# Altium PCB FV1_Final_V1.1.pcbdoc
Units mil, origin at the board's own origin, x right, y up, seen from the top; angles counter-clockwise.
Board outline 7337.36 x 6064.41 mil, 2 copper layers (Top Layer, Bottom Layer); 92 components, 87 nets, 298 pads, 78 vias.
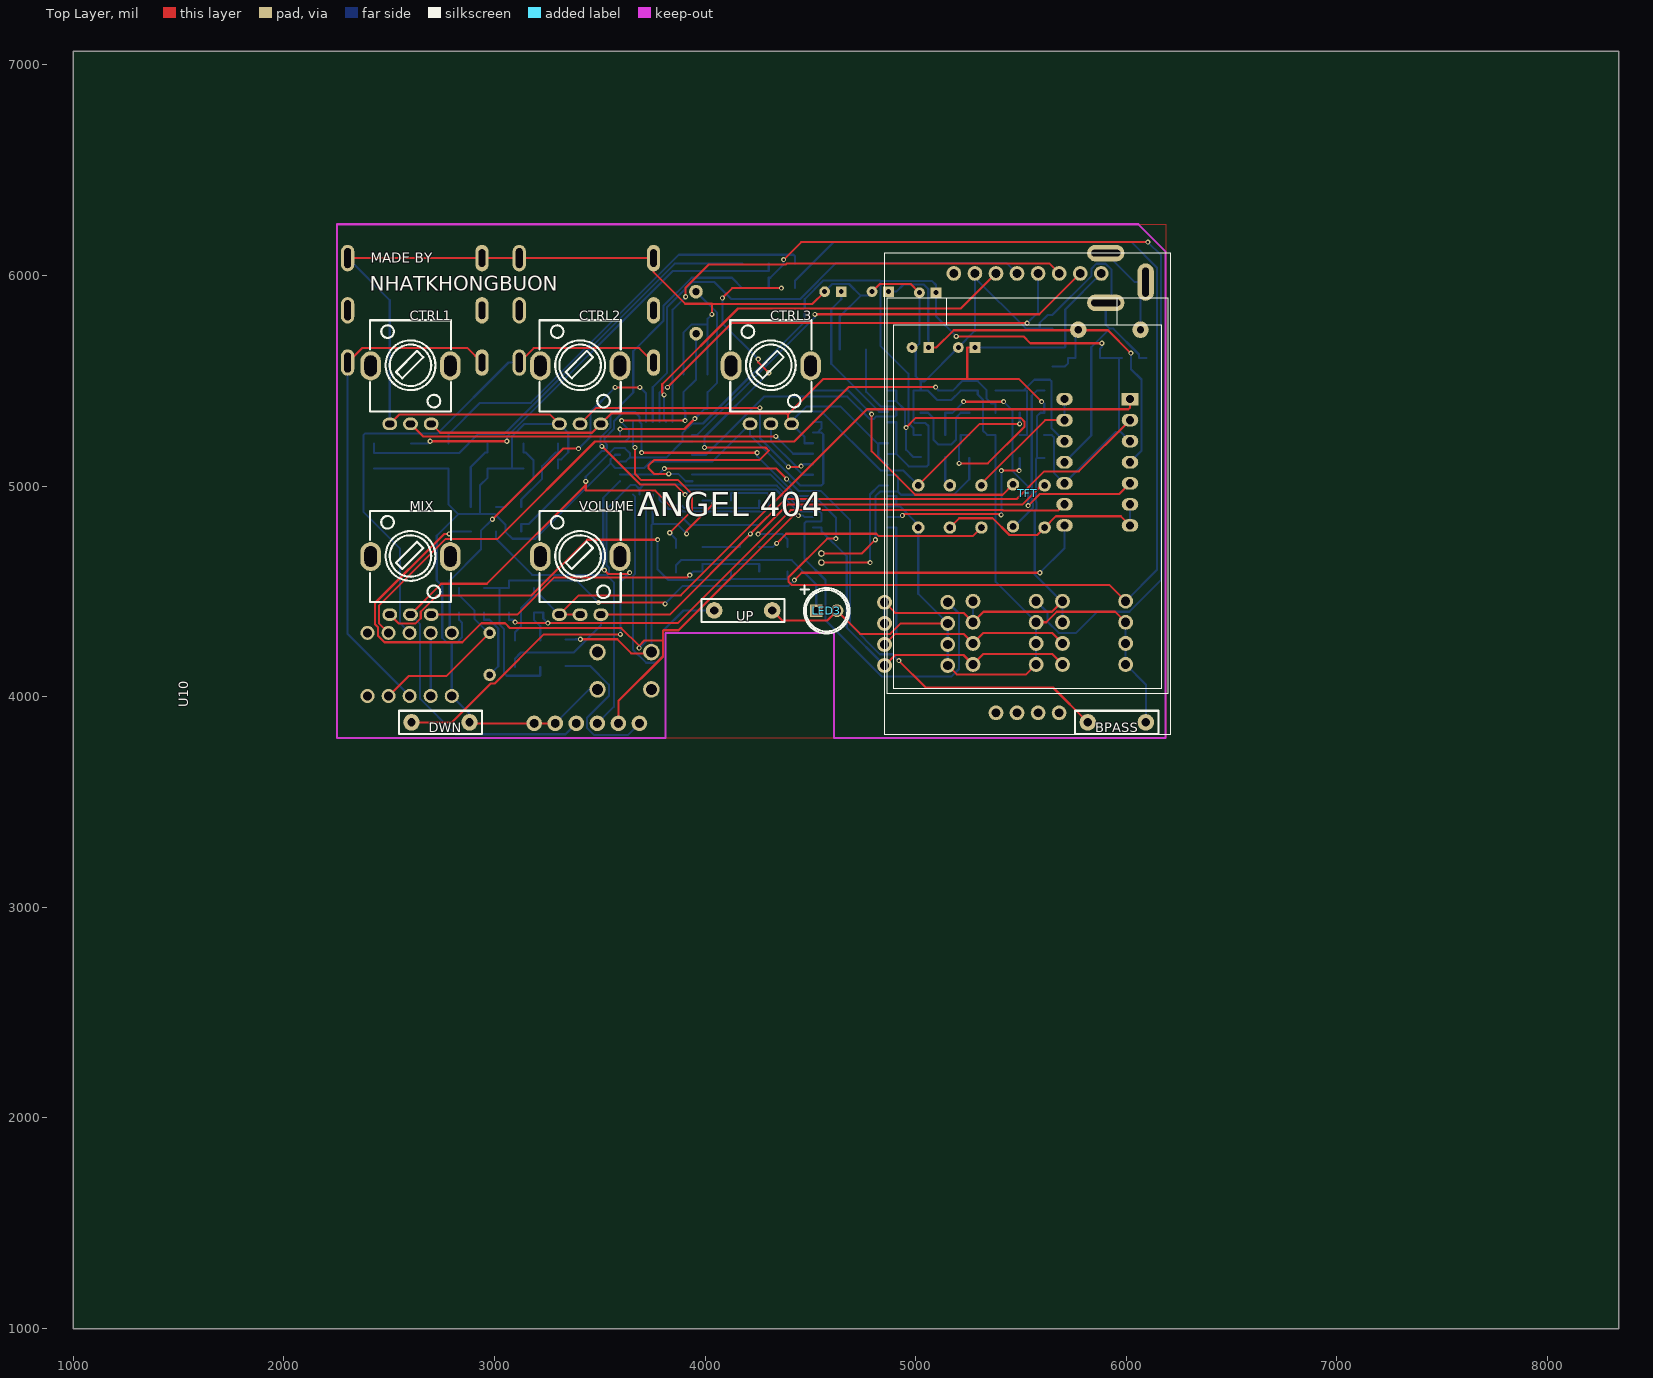
[diagram p0: Top Layer view]
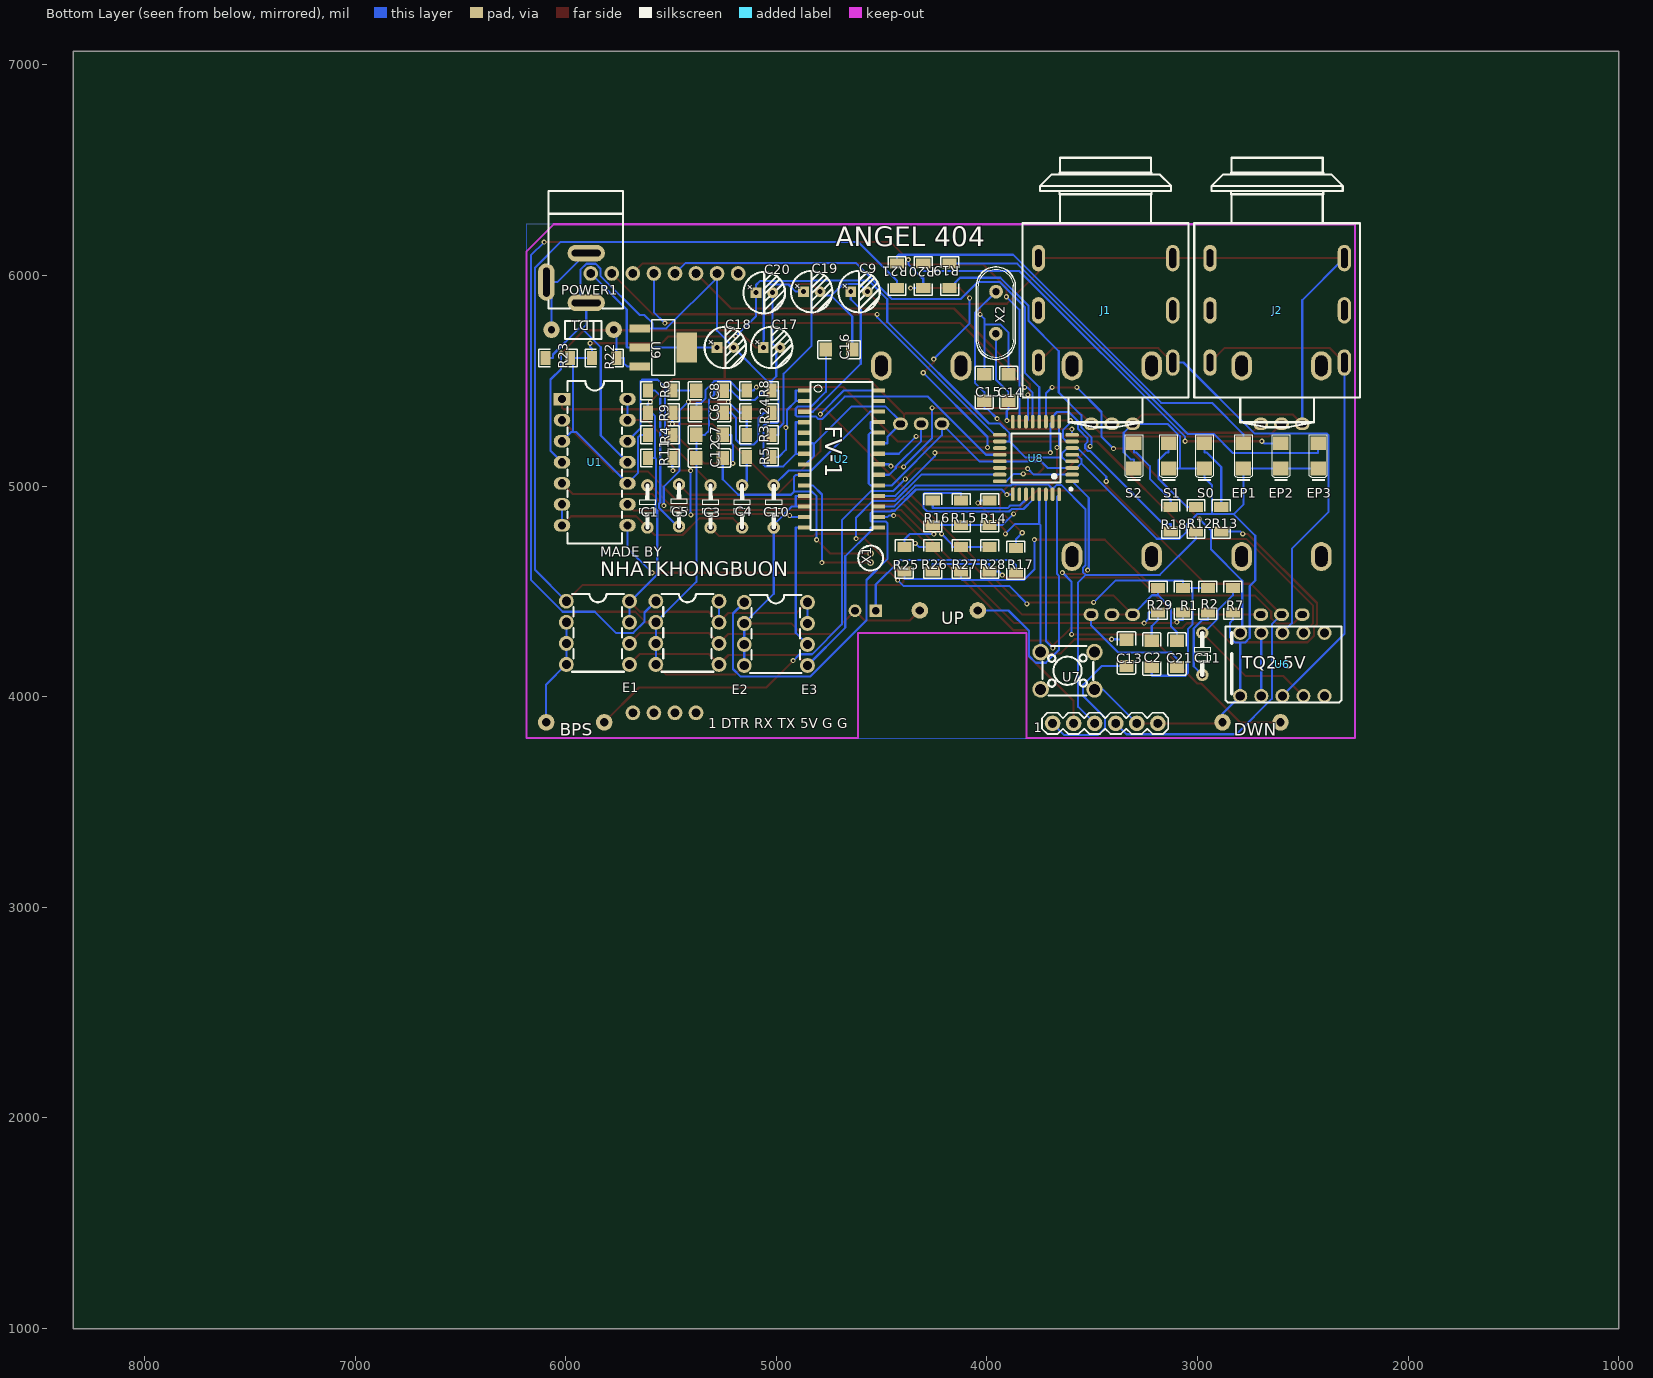
[diagram p1: Bottom Layer view, seen from below]

## Layer stack, top to bottom
Top Layer: signal copper (thickness not stored)
Dielectric: dielectric 12.6, FR-4, Dk 4.8
Bottom Layer: signal copper (thickness not stored)

## Board outline
8337.36,1000 1000,1000 1000,7064.41 8337.36,7064.41

## Components (designator, comment, footprint, x,y, rotation, side; value= is the part's Value field where it differs from the comment)
1 "M06SIP" 1X06 3451.73,3873.5 r0 bottom
BPASS "Momentary Footswitch" "MOMENTARY FOOTSWITCH" 5816.73,3878.5 r0 top
C1 "1u" "MLCC 5MM" 5611.73,4903.5 r270 bottom
C2 "470p" C1206 3216.73,4203.5 r90 bottom
C3 "1u" "MLCC 5MM" 5311.73,4903.5 r90 bottom
C4 "1u" "MLCC 5MM" 5161.73,4903.5 r270 bottom
C5 "1u" "MLCC 5MM" 5461.73,4908.5 r90 bottom
C6 "100n" C1206 5316.73,5348.5 r0 bottom
C7 "1n" C1206 5316.73,5243.5 r0 bottom
C8 "2n2" C1206 5316.73,5453.5 r180 bottom
C9 "10u" CAP_GT_5X11 4606.73,5923.5 r0 bottom
C10 "1u" "MLCC 5MM" 5011.73,4903.5 r90 bottom
C11 "1u" "MLCC 5MM" 2976.73,4203.5 r270 bottom
C12 "15p" C1206 5316.73,5133.5 r180 bottom
C13 "0.1u" C1206 3336.73,4208.5 r90 bottom
C14 "22p" C1206 3896.73,5468.5 r90 bottom
C15 "22p" C1206 4011.73,5468.5 r90 bottom
C16 "0.1u" C1206 4701.73,5648.5 r0 bottom
C17 "10U" CAP_GT_5X11 5021.73,5658.5 r0 bottom
C18 "47U" CAP_GT_5X11 5241.73,5658.5 r0 bottom
C19 "100U" CAP_GT_5X11 4831.73,5923.5 r0 bottom
C20 "47U" CAP_GT_5X11 5056.73,5918.5 r0 bottom
C21 "220p" C1206 3096.73,4203.5 r270 bottom
CTRL1 "B100K" RES-ADJ-TH_RV09 2600.71,5433.41 r0 top
CTRL2 "B100K" RES-ADJ-TH_RV09 3406.22,5433.41 r0 top
CTRL3 "B100K" RES-ADJ-TH_RV09 4311.73,5433.41 r0 top
D1 "1N5159" DIODE 5771.73,5743.5 r180 bottom
DWN "Momentary Footswitch" "MOMENTARY FOOTSWITCH" 2605.43,3878.3 r0 top
E1 "24LC32AF-E/P" PDIP-8_L9.3-W6.4-P2.54-LS7.6-BL 5846.73,4303.5 r90 bottom
E2 "24LC32AF-E/P" PDIP-8_L9.3-W6.4-P2.54-LS7.6-BL 5421.73,4303.5 r90 bottom
E3 "24LC32AF-E/P" PDIP-8_L9.3-W6.4-P2.54-LS7.6-BL 5001.73,4298.5 r90 bottom
EP1 "LED" LED1206-FD_GREEN 2781.73,5143.5 r90 bottom
EP2 "LED" LED1206-FD_GREEN 2604.23,5143.5 r90 bottom
EP3 "LED" LED1206-FD_GREEN 2426.73,5143.5 r90 bottom
J1 "JACK 6.5mm" AUDIO-TH_PJ-609BA 3436.14,5834.99 r90 bottom
J2 "JACK 6.5mm" AUDIO-TH_PJ-609BA 2621.18,5834.99 r90 bottom
LED3 "LED-1206_G" LED-DIP-Φ5*2.5MM 4576.73,4408.5 r0 top
MIX "B100K" RES-ADJ-TH_RV09 2600.71,4527.9 r0 top
POWER1 "DC-005 5.5-2.0MM" DC-IN-TH_DC-5520-1 5996.73,5988.5 r90 bottom
R1 "15K" R1206 3068.39,4458.5 r90 bottom
R2 "100R" R1206 2950.06,4458.5 r270 bottom
R3 "1M" R1206 5081.73,5243.5 r0 bottom
R4 "100K" R1206 5551.73,5243.5 r180 bottom
R5 "1K" R1206 5081.73,5138.5 r180 bottom
R6 "1K" R1206 5551.73,5453.5 r0 bottom
R7 "100K" R1206 2831.73,4458.5 r90 bottom
R8 "1M" R1206 5081.73,5453.5 r180 bottom
R9 "100R" R1206 5551.73,5348.5 r180 bottom
R11 "10K" R1206 5551.73,5133.5 r0 bottom
R12 "330R" R1206 3006.73,4843.5 r270 bottom
R13 "330R" R1206 2886.73,4843.5 r270 bottom
R14 "10K" R1206 3986.73,4873.5 r90 bottom
R15 "1k" R1206 4121.73,4873.5 r90 bottom
R16 "1k" R1206 4256.73,4873.5 r90 bottom
R17 "330R" R1206 3861.73,4648.5 r270 bottom
R18 "330R" R1206 3126.73,4843.5 r90 bottom
R19 "330R" R1206 4176.73,5998.5 r90 bottom
R20 "330R" R1206 4301.73,5998.5 r90 bottom
R21 "330R" R1206 4426.73,5998.5 r90 bottom
R22 "10K" R1206 5816.73,5608.5 r0 bottom
R23 "12K" R1206 6036.73,5608.5 r180 bottom
R24 "1K" R1206 5081.73,5348.5 r0 bottom
R25 "15K" R1206 4391.73,4653.5 r270 bottom
R26 "15K" R1206 4256.73,4653.5 r270 bottom
R27 "15K" R1206 4121.73,4653.5 r90 bottom
R28 "15K" R1206 3986.73,4653.5 r90 bottom
R29 "15K" R1206 3186.73,4458.5 r270 bottom
S0 "LED-1206_G" LED1206-FD_GREEN 2966.73,5143.5 r90 bottom
S1 "LED-1206_G" LED1206-FD_GREEN 3136.73,5143.5 r90 bottom
S2 "LED-1206_G" LED1206-FD_GREEN 3301.73,5143.5 r90 bottom
TFT "1.8\"_TFT" "1.8\"_TFT" 5451.73,4958.5 r270 top
U1 "TL074ING4" PDIP-14_L19.6-W6.5-P2.54-LS7.9-BL 5861.73,5113.5 r90 bottom
U2 "FV-1" FV-1 4866.73,4803.5 r0 bottom
U6 "ATQ209SA" ATQ209 2876.73,4343.5 r0 bottom
U7 "SW" KEY-TH_4P-L6.0-W6.0-P4.50-LS6.50 3616.73,4123.5 r0 bottom
U8 "ATMEGA328P-AUR" TQFP-32_L7.0-W7.0-P0.80-LS9.0-BL 3766.73,5133.5 r270 bottom
U9 "AMS1117-3.3V" SOT-223-4_L6.5-W3.5-P2.30-LS7.0-BR 5536.73,5658.5 r180 bottom
U10 "1590BB COPY" 1590BB-EMI 4171.73,4563.5 r90 top
UP "Momentary Footswitch" "MOMENTARY FOOTSWITCH" 4042.43,4409.79 r0 top
VOLUME "B100K" RES-ADJ-TH_RV09 3406.22,4527.9 r0 top
X1 "-" OSC-TH_BD3.0-P1.10-D0.4 4551.73,4658.5 r270 bottom
X2 "Crystal 16Mhz" GM-CRYSTAL-16MHZ 3956.73,5823.5 r270 bottom
? "" ? 4216.73,3603.65 r0 top
? "" ? 2997.52,2177.22 r0 top
? "" ? 7107.17,5488.74 r0 top
? "" ? 7719.52,4563.56 r0 top
? "" ? 4173.7,1602.43 r0 top
? "" ? 3059.53,2437.07 r0 top
? "" ? 4171.73,1901.65 r0 top
? "" ? 7445.14,4561.6 r0 top
? "" ? 6772.91,5424.09 r0 top
? "" ? 1663.18,2777.06 r0 top

## Footprints (in the part's own frame and the unit in brackets; to place one, negate y for a bottom-side part, rotate by r counter-clockwise, add the part's x,y. Pads: shape width x height; smd on the part's side, far side on the other; paste and mask are expansions set on the pad)
"1.8\"_TFT" [mil]
  round 70 hole 39.36 paste+0 mask+2: P$3(1035.04,228.74) P$4(1035.04,129.13) P$5(1035.04,29.13) P$6(1035.04,-70.87) P$9(-1051.57,429.13) P$10(-1051.57,329.13) P$11(-1051.57,229.13) P$12(-1051.57,129.13) P$13(-1051.57,29.13) P$14(-1051.57,-70.87) P$15(-1051.57,-170.87) P$16(-1051.57,-270.87)
  silkscreen extent -1150,-600 1139,757
1X06 [mil]
  round 74 hole 40 slot 40.2 at 90 deg paste+0 mask+2: 1(236.22,0) 2(136.22,0) 3(36.22,0) 4(-63.78,0) 5(-163.78,0) 6(-263.78,0)
  silkscreen extent -314,-50 286,50
1590BB-EMI [mil]
ATQ209 [mil]
  round 66.93 hole 43.31 paste+0 mask+2: 1(-80,40) 2(-180,40) 3(-280,40) 4(-380,40) 5(-480,40) 6(-480,340) 7(-380,340) 8(-280,340) 9(-180,340) 10(-80,340)
  silkscreen extent -560,10 -10,370
AUDIO-TH_PJ-609BA [mm]
  oval 3.2x1.6 hole 0.8 slot 2.1 at 0 deg paste+0 mask+0.051: 2(6.3,8.1) 4(0,8.1) 6(-6.3,8.1)
  oval 3.2x1.6 hole 0.8 slot 2.4 at 0 deg paste+0 mask+0.051: 3(6.3,-8.1) 5(0,-8.1) 7(-6.3,-8.1)
  silkscreen extent -14.1,-10 18.4,10
C1206 [mm]
  rect 1.485x1.728 smd paste-100 mask+0.051: 1(1.593,0) 2(-1.593,0)
  silkscreen extent -2.56,-1.09 2.56,1.09
CAP_GT_5X11 [mm]
  rect 1.3x1.3 hole 0.6 paste+0 mask+0.051: 1(1.001,0)
  round 1.3 hole 0.6 paste+0 mask+0.051: 2(-1.001,0)
  silkscreen extent -2.5,-2.5 2.5,2.5
DC-IN-TH_DC-5520-1 [mm]
  oval 4.5x2 hole 0.8 slot 3.5 at 0 deg paste+0 mask+0.051: 2(-0.5,2.4)
  oval 2x4.5 hole 0.8 slot 3.5 at 90 deg paste+0 mask+0.051: 3(3,-2.4) 4(-3,-2.4)
  silkscreen extent -3.7,-6.85 10.5,2.16
DIODE [mm]
  round 2 hole 0.9 paste+0 mask+0.051: 1(0,-0.016) 2(-7.5,-0.016)
  silkscreen extent -5.87,-1.14 -1.47,1.06
FV-1 [mm]
  rect 1.5x0.5 smd paste+0 mask+0.051: 1(0.001,-16.51) 2(0.001,-15.241) 3(0.001,-13.97) 4(0.001,-12.701) 5(0,-11.43) 6(0.001,-10.16) 7(0.001,-8.891) 8(0,-7.62) 9(0.001,-6.35) 10(0,-5.08) 11(0,-3.81) 12(0.001,-2.54) 13(0,-1.27) 14(0,0) 15(-9.01,0) 16(-9.009,-1.28) 17(-9.009,-2.55) 18(-9.009,-3.82) 19(-9.009,-5.09) 20(-9.009,-6.36) 21(-9.01,-7.63) 22(-9.009,-8.901) 23(-9.009,-10.17) 24(-9.009,-11.44) 25(-9.009,-12.711) 26(-9.009,-13.98) 27(-9.009,-15.251) 28(-9.009,-16.52)
  silkscreen extent -8.22,-17.57 -0.76,0.29
GM-CRYSTAL-16MHZ [mil]
  round 65 hole 32 slot 32.2 at 0 deg paste+0 mask+2: 1(99.51,-0.5) 2(-100,0.5)
  silkscreen extent -217,-93 223,92
KEY-TH_4P-L6.0-W6.0-P4.50-LS6.50 [mm]
  round 2 hole 1.3 paste+0 mask+0.051: 1(3.25,-2.25) 2(-3.25,-2.25) 3(3.25,2.25) 4(-3.25,2.25)
  silkscreen extent -3.1,-3 3,3
LED1206-FD_GREEN [mm]
  rect 1.635x1.87 smd paste-100 mask+0.051: 1(1.517,0) 2(-1.518,0)
  silkscreen extent -2.98,-1.06 2.58,1.05
LED-DIP-Φ5*2.5MM [mil]
  rect 60x60 hole 36 paste+0 mask+2: 1(-49.21,0)
  round 60 hole 36 paste+0 mask+2: 2(49.21,0)
  silkscreen extent -125,-108 108,120
"MLCC 5MM" [mil]
  round 59.05 hole 29.52 slot 29.53 at 0 deg paste+0 mask+2: 1(100,0) 2(-100,0)
  silkscreen extent -100,-39 100,39
"MOMENTARY FOOTSWITCH" [mm]
  round 2 hole 1 paste+0 mask+0.051: 1(0,0) 2(7,0)
  silkscreen extent -1.52,-1.4 8.51,1.4
OSC-TH_BD3.0-P1.10-D0.4 [mm]
  round 0.8 hole 0.5 paste+0 mask+0.051: 1(0.55,0) 2(-0.55,0)
  silkscreen extent -1.5,-1.5 1.5,1.5
PDIP-8_L9.3-W6.4-P2.54-LS7.6-BL [mm]
  round 1.8 hole 1.1 paste+0 mask+0.051: 1(3.81,3.81) 2(1.27,3.81) 3(-1.27,3.81) 4(-3.81,3.81) 5(-3.81,-3.81) 6(-1.27,-3.81) 7(1.27,-3.81) 8(3.81,-3.81)
  silkscreen extent -4.7,-3.11 4.7,3.11
PDIP-14_L19.6-W6.5-P2.54-LS7.9-BL [mm]
  rect 1.5x2 hole 1 paste+0 mask+0.051: 1(7.62,3.95)
  oval 1.5x2 hole 1 paste+0 mask+0.051: 2(5.08,3.95) 3(2.54,3.95) 4(0,3.95) 5(-2.54,3.95) 6(-5.08,3.95) 7(-7.62,3.95) 8(-7.62,-3.95) 9(-5.08,-3.95) 10(-2.54,-3.95) 11(0,-3.95) 12(2.54,-3.95) 13(5.08,-3.95) 14(7.62,-3.95)
  silkscreen extent -9.8,-3.3 9.8,3.3
R1206 [mil]
  rect 47.54x66.97 smd paste-3937.01 mask+2: 1(58.22,0) 2(-58.22,0)
  silkscreen extent -91,-42 91,42
RES-ADJ-TH_RV09 [mm]
  oval 1.8x1.5 hole 0.8 slot 1.1 at 0 deg paste+0 mask+0.05: 1(-2.5,-3.5) 2(0,-3.5) 3(2.5,-3.5)
  oval 2.5x3.5 hole 1.5 slot 2.5 at 90 deg paste+0 mask+0.05: 4(4.8,3.5) 5(-4.8,3.5)
  silkscreen extent -4.9,-2 4.9,9
SOT-223-4_L6.5-W3.5-P2.30-LS7.0-BR [mm]
  rect 2.47x0.98 smd paste+0 mask+0.051: 1(-2.835,2.3) 2(-2.835,0) 3(-2.835,-2.3)
  rect 2.47x3.6 smd paste+0 mask+0.051: 4(2.835,0)
  silkscreen extent -1.37,-3.33 1.37,3.33
TQFP-32_L7.0-W7.0-P0.80-LS9.0-BL [mm]
  oval 0.45x1.65 smd paste+0 mask+0.051: 1(2.8,4.369) 2(2,4.369) 3(1.2,4.369) 4(0.4,4.369) 5(-0.4,4.369) 6(-1.2,4.369) 7(-2,4.369) 8(-2.8,4.369) 17(-2.8,-4.369) 18(-2,-4.369) 19(-1.2,-4.369) 20(-0.4,-4.369) 21(0.4,-4.369) 22(1.2,-4.369) 23(2,-4.369) 24(2.8,-4.369)
  oval 1.65x0.45 smd paste+0 mask+0.051: 9(-4.381,2.8) 10(-4.381,2) 11(-4.381,1.2) 12(-4.381,0.4) 13(-4.381,-0.4) 14(-4.381,-1.2) 15(-4.382,-2) 16(-4.382,-2.8) 25(4.381,-2.8) 26(4.381,-2) 27(4.381,-1.2) 28(4.381,-0.4) 29(4.381,0.4) 30(4.381,1.2) 31(4.382,2) 32(4.382,2.8)
  silkscreen extent -2.94,-2.95 3.91,4.36
? [mil]

## Via types
v1: diameter 24.02, hole 12.01, Top Layer to Bottom Layer, tented both sides, 70 vias
v2: diameter 24.41, hole 12.2, Top Layer to Bottom Layer, tented both sides, 8 vias

## Nets (pads, with @x,y where several pads share a name; then routed paths per layer and width w, separated by ;. In a path a pad name is that pad's centre, name@x,y a point inside that pad or via, vN(x,y) a via of type N, cw(c..) or ccw(c..) an arc to the next point about the centre after c; other vN are vias at no path point)
9V: D1.2 POWER1.2 POWER1.3 | length 472
  Bottom Layer w10: POWER1.3 6040.03,5968.82 POWER1.2@6067.01,5968.82 ; D1.2 POWER1.2@6067.01,5968.82 ; POWER1.2 POWER1.2@6067.01,5968.82
+3.3V: C18.1 CTRL1.3 CTRL2.3 CTRL3.3 E1.7 E1.8 E2.7 E2.8 E3.7 E3.8 R9.2 R11.1 TFT.P$9 U2.6 U2.8 U2.23 U9.2 U9.4 | length 7313.5
  Top Layer w10: CTRL1.3 2741.38,5253.37 3462.41,5253.37 CTRL2.3 3555.44,5346.4 4386.84,5346.4 4392.87,5340.37 ; CTRL3.3 4392.87,5312.9 4392.87,5340.37 ; E3.8 4901.73,4398.5 5226.73,4398.5 E2.7 5321.73,4403.5 5646.73,4403.5 E1.8 ; C18.1 5244.55,5658.5 5244.55,5509.49 ; v1(5597.77,5401) 5489.28,5509.49 5244.55,5509.49 ; 4392.87,5340.37 4561.99,5509.49 5244.55,5509.49
  Bottom Layer w10: U2.23 4471.49,5203.9 4471.49,5234.28 CTRL3.3 4410.16,5307.38 4481.67,5378.89 4641.88,5378.89 4821.74,5199.03 ; E3.7 E3.8 ; U2.8 4860.77,5103.51 4821.74,5142.54 4821.74,5199.03 ; U2.6@4866.73,5203.51 4826.22,5203.51 4821.74,5199.03 ; E2.7 E2.8 ; C18.1 U9.4 5588.73,5658.5 5622.51,5658.5 U9.2 5707.96,5658.5 5709.82,5660.36 5709.82,5839.03 TFT.P$9 ; v1(5597.77,5401) 5605.8,5392.97 5609.95,5392.97 5609.95,5348.5 5592.57,5348.5 5575.12,5331.05 5575.12,5133.57 5575.19,5133.5 ; R11.1@5609.95,5133.5 5575.19,5133.5 ; E1.7 E1.8 5692.1,4453.5 5564.97,4580.63 5564.97,4883.51 5572.98,4891.52 5572.98,4923.94 5569.95,4926.97 5569.95,5128.26 5575.19,5133.5
+5V: 1.4 C20.1 MIX.2 R3.2 R4.2 R14.2 R15.2 R16.2 R22.1 R23.1 U1.3 U1.10 U8.4 U8.6 U8.18 | length 8659.5
  Top Layer w10: MIX.2 2746.98,4536.37 2963.67,4536.37 3432.9,5005.6 v1(3432.9,5022.71) ; 3432.93,5005.6 3432.93,4978.5 3763.03,4978.5 v1(3872.79,4868.69) ; v1(5192.28,5710.97) 5511.75,5710.97 5544.06,5678.66 v1(5884.08,5678.66)
  Bottom Layer w10: MIX.2 2646.73,4344.08 2646.73,3989.68 2814.36,3822.05 3336.5,3822.05 1.4 ; v1(3432.9,5022.71) 3432.9,5044.9 3568.74,5180.74 U8.6 3618.21,5180.74 3643.74,5155.21 3643.74,5138.3 ; U8.4 3623.19,5117.75 3643.74,5138.3 ; v1(3872.79,4868.69) 3926.2,4815.28 R14.2 R15.2 R16.2 ; U8.18 3891.86,5212.24 ; R3.2 4988.75,5243.5 4988.75,5276.28 4964.94,5300.09 4964.94,5533.83 4831.73,5667.04 4831.73,5973.28 ; v1(5192.28,5710.97) 5096.13,5807.12 C20.1 5096.13,5955.08 5077.93,5973.28 4831.73,5973.28 ; R4.2@5609.95,5243.5 5644.71,5243.5 5655.74,5232.47 5655.74,5063.98 U1.10 5949.69,5256.97 5965.56,5256.97 ; v1(5884.08,5678.66) 5884.08,5662.1 5874.95,5652.97 5874.95,5608.5 R23.1@5965.56,5608.5 ; R23.1 R23.1@5965.56,5608.5 ; U1.3 5973.77,5256.97 5965.56,5256.97 ; 3643.74,5138.3 3646.43,5135.61 3815.23,5135.61 3891.86,5212.24 ; 3891.86,5212.24 3891.86,5250.76 3938.28,5297.18 3989.71,5297.18 4472.7,5780.17 4472.7,5887.72 4561.41,5976.43 4828.58,5976.43 4831.73,5973.28 ; 5965.56,5256.97 R23.1@5965.56,5608.5
A3: U8.26
A4: R16.1 U8.27 | length 519.6
  Bottom Layer w10: U8.27 3813.97,4936.66 3842.83,4907.8 3889,4907.8 3901.35,4895.45 4255.22,4895.45 4256.73,4896.96 R16.1
A5: R15.1 U8.28 | length 855.1
  Bottom Layer w10: U8.28 3782.48,4935.11 3825.84,4891.75 3882.35,4891.75 3894.7,4879.4 4283.55,4879.4 4301.27,4897.12 4301.27,4960.06 4294.78,4966.55 4121.8,4966.55 4121.73,4966.48 R15.1
A6: U8.19
A7: U8.22
BYPASS_BTN: BPASS.1 U8.2 | length 3023
  Top Layer w10: v1(3806.73,5083.5) 4337.46,5083.5 v1@4387.05,5033.91 ; v1(4919.86,4171.42) 5047.5,4043.78 5651.45,4043.78 BPASS.1
  Bottom Layer w10: U8.2 3777.99,5054.76 v1(3806.73,5083.5) ; v1(4387.05,5033.91) 4443.34,4977.62 4548.88,4977.62 4688.07,4838.43 4688.07,4343.42 4829.48,4202.01 4889.27,4202.01 v1(4919.86,4171.42)
C1_2: C1.2 R25.2 | length 1642.1
  Top Layer w10: v1(4251.3,4772.49) 4390.9,4912.09 5505.62,4912.09 5597.03,5003.5 C1.2
  Bottom Layer w10: v1(4251.3,4772.49) 4365.73,4772.48 4391.73,4746.48 R25.2
C3_2: C3.2 R26.2 | length 1102.1
  Top Layer w10: v1(4339.06,4727.8) 4385.16,4773.9 4812.67,4773.9 4823.68,4762.89 5271.12,4762.89 C3.2
  Bottom Layer w10: R26.2 4301.2,4711.72 4322.98,4711.72 v1(4339.06,4727.8)
C4_2: C4.2 R5.2 | length 144
  Bottom Layer w10: R5.2@5139.95,5138.5 5139.95,5025.28 C4.2
C5_2: C5.2 R6.1 | length 735.1
  Bottom Layer w10: C5.2 5467.26,4808.5 5556.93,4898.17 5556.93,4917.29 5550.77,4923.45 5550.77,5429.08 5575.19,5453.5 R6.1@5609.95,5453.5
C6_2: C6.2 R24.2 | length 476.8
  Bottom Layer w10: R24.2 5058.27,5348.5 5083.97,5322.8 5083.97,5220.25 5106.31,5197.91 5168.18,5197.91 5190.83,5220.56 5190.83,5325.52 5213.81,5348.5 C6.2
DOWN_BTN: DWN.1 U8.1 | length 2063.9
  Top Layer w10: DWN.1 2797.97,3878.3 2982.58,4062.91 2999.94,4062.91 3233.12,4296.09 v1(3597.82,4296.09) ; v1(3521.14,4601.55) 3539.96,4582.73 3633.77,4582.73 v1(3640.79,4589.75)
  Bottom Layer w10: v1(3521.14,4601.55) 3515.75,4606.94 3515.75,4944.28 U8.1 ; v1(3597.82,4296.09) 3597.83,4546.79 v1(3640.79,4589.75)
DTR: 1.1 C13.2 | length 778.2
  Bottom Layer w10: C13.2 3381.74,4145.8 3453.9,4145.8 3542.58,4057.12 3542.58,4003.85 3437.95,3899.22 3437.95,3852.54 3472.99,3817.5 3631.95,3817.5 1.1
E1: E1.1 R21.2 U8.23 | length 6354.2
  Top Layer w10: v1(4620.78,4750.84) 4579.78,4750.84 4395.23,4566.29 4395.23,4546.98 4412.22,4529.99 5920.24,4529.99 E1.1
  Bottom Layer w10: U8.23 4310.89,5054.76 4435.71,4929.94 4542.09,4929.94 4620.78,4851.25 v1(4620.78,4750.84) ; R21.2 4426.73,5975.04 4611.44,6159.75 6023.53,6159.75 6144.86,6038.42 6144.86,4601.63 E1.1
E2: E2.1 R20.2 U8.24 | length 6792.3
  Top Layer w10: v2(3826.73,5058.5) 3756.73,5058.5 3731.73,5083.5 3731.73,5098.5 3756.73,5123.5 4256.73,5123.5 4301.73,5168.5 4286.73,5183.5 v2(3996.73,5183.5) ; v2(4081.73,5893.5) 4128.51,5940.28 v2(4361.73,5940.28) ; v2(4251.73,5603.5) 4251.73,5588.5 v2(4301.73,5538.5) ; v1(4372.27,6075.73) 4455.39,6158.85 v1(6102.29,6158.85)
  Bottom Layer w10: v2(3826.73,5058.5) 3871.73,5058.5 3906.97,5023.26 U8.24 ; v2(3996.73,5183.5) 3996.73,5233.5 v2(4301.73,5538.5) ; v2(4081.73,5893.5) 4081.73,5773.5 v2(4251.73,5603.5) ; v2(4361.73,5940.28) R20.2 4301.73,5975.04 4301.73,5989.58 4308.96,5989.58 4372.27,6052.89 v1(4372.27,6075.73) ; E2.1 5625.24,4399.99 5625.24,4356.43 5678.17,4303.5 5761.22,4303.5 5861.22,4403.5 6013.63,4403.5 6165,4554.87 6165,6096.14 v1(6102.29,6158.85)
E3: E3.1 R19.2 U8.25 | length 4188.2
  Top Layer w10: v1(3509.81,5189.08) 3690.43,5008.5 3855.93,5008.5 v1(3904.72,4959.71)
  Bottom Layer w10: v1(3509.81,5189.08) 3502.48,5196.41 3502.48,5230.16 3551.13,5278.81 3551.13,5337.24 3658.48,5444.59 3658.48,5641.35 3801.9,5784.77 3801.9,5855.93 3935.53,5989.56 4127.45,5989.56 R19.2 ; U8.25 3903.43,4961 v1(3904.72,4959.71) 3928.84,4983.83 4336.42,4983.83 4436.99,4883.26 4451.98,4883.26 4456.35,4878.89 4544.6,4878.89 4552.6,4870.89 4552.6,4835.9 4549.69,4832.99 4481.41,4832.99 4470.79,4822.37 4470.79,4654.86 4571.07,4554.58 4571.07,4363.42 4837.52,4096.97 5170.54,4096.97 5205.24,4131.67 5205.24,4394.99 E3.1
GND: 1.5 1.6 BPASS.2 C7.1 C8.1 C9.2 C10.2 C12.2 C14.1 C15.1 C16.2 C17.2 C18.2 C19.2 C20.2 CTRL1.1 CTRL2.1 CTRL3.1 DWN.2 E1.2 E1.3 E1.4 E2.2 E2.3 E2.4 E3.2 E3.3 E3.4 EP1.2 EP2.2 EP3.2 J1.2 J1.3 J2.2 J2.3 LED3.2 POWER1.4 R7.2 R8.1 R23.2 S0.2 S1.2 S2.2 TFT.P$15 U1.11 U2.4 U2.7 U2.11 U2.12 U2.19 U2.24 U2.25 U6.10 U7.4 U8.3 U8.5 U8.21 U9.1 UP.2 | length 21280.5
  Top Layer w10: J2.3 J2.2 J1.3 J1.2 3755.04,6016.23 3905.42,5865.85 4031.73,5865.85 v1(4031.73,5815.13) ; CTRL1.1 2546.07,5339.39 3264.02,5339.39 CTRL2.1 ; DWN.2 2885.82,3873.5 1.6 1.5 ; 4031.73,5865.8 4509.63,5865.8 C9.2 ; UP.2 4365.89,4361.93 4579.37,4361.93 LED3.2 4735.94,4298.5 4879.02,4298.5 4929.02,4348.5 E3.2 ; C19.2 4828.98,5960.15 4975.68,5960.15 C20.2 ; E3.4 5194.28,4105.95 5524.18,4105.95 E2.4 ; E2.2 5619.44,4353.5 5669.44,4403.5 5946.73,4403.5 E1.2
  Bottom Layer w10: J2.3 2502.29,5883.01 CTRL1.1 ; EP3.2 EP2.2 EP1.2 2781.73,4912.13 2826.97,4866.89 ; R7.2 2831.73,4382.9 2831.73,4365.52 2844.79,4352.46 2844.79,4281 2820.77,4256.98 2796.73,4256.98 ; DWN.2 2881.02,3919.21 U6.10 2796.73,4256.98 ; S1.2 3083.6,5083.76 ; 1.5 3449.37,4034.92 U7.4 ; S2.2 3301.73,5126.94 3316.39,5126.94 3349.6,5160.15 3349.6,5253.81 CTRL2.1 3141.96,5295.61 3083.6,5237.25 3083.6,5083.76 ; U8.5@3594.73,5149.25 3572.54,5149.25 3551.08,5127.79 3551.08,5108.05 ; C14.1 3896.73,5729.03 3935.83,5768.13 4011.73,5768.13 ; C15.1 4011.73,5768.13 ; v1(4031.73,5815.13) 4011.73,5795.13 4011.73,5768.13 ; U2.24 U2.24@4532.26,5253.89 ; U2.25 4532.27,5303.89 4552.53,5303.89 4552.53,5274.16 U2.24@4532.26,5253.89 ; C9.2 4603.98,5960.15 4682.8,5960.15 4738.12,5904.83 ; C16.2 4639.03,5805.74 4738.12,5904.83 ; C19.2 4773.66,5904.83 4738.12,5904.83 ; U2.11 4907.24,4953.49 4907.25,4903.5 ; U2.12@4866.73,4903.5 4907.25,4903.5 ; U2.7@4866.73,5153.51 4907.25,5153.51 ; U2.4@4866.73,5303.5 4907.25,5303.5 4907.32,5303.43 4907.32,5153.58 4907.25,5153.51 ; C17.2 C17.2@4999.83,5658.5 ; C20.2 5017.33,5676 C17.2@4999.83,5658.5 ; E3.4 E3.3 E3.2 5011.73,4488.5 C10.2 5011.73,4817.44 4925.67,4903.5 4907.25,4903.5 ; E2.4 E2.3 E2.2 5379.43,4545.8 5379.43,5088.49 C12.2 C7.1 5339.21,5243.5 5319.51,5263.2 5319.51,5409.83 5294.26,5435.08 5294.26,5453.5 5274.15,5453.5 C8.1 5213.81,5453.5 5213.32,5453.5 5168.78,5408.96 5102.81,5408.96 5058.27,5453.5 R8.1 ; U9.1 5588.73,5749.05 ; U1.11 5833.16,5240.44 5833.16,5660.35 5920.75,5747.94 ; E1.2 E1.3 E1.4 6092.32,4057.91 BPASS.2 ; R23.2@6094.95,5608.5 6060.19,5608.5 6060.19,5625.32 5937.57,5747.94 5920.75,5747.94 ; 2796.73,4256.98 2774.02,4256.98 2751.32,4279.68 2751.32,4526.12 2725.18,4552.26 2725.18,4765.1 2826.97,4866.89 ; 2826.97,4866.89 2928.36,4866.89 2931.27,4869.8 ; 2931.27,4869.8 2934.18,4866.89 3002.14,4866.89 3051.27,4817.76 3051.27,4784.1 3084.92,4750.45 3193.48,4750.45 3551.08,5108.05 ; 2931.27,4869.8 2931.27,5005.13 2966.73,5040.59 S0.2 3083.6,5083.76 ; 3551.08,5108.05 3572.87,5086.26 U8.3 3710.97,5086.26 3742.46,5117.75 U8.21 4035.45,5117.75 CTRL3.1 4213.31,5240.87 4450.3,5003.88 4471.49,5003.88 U2.19 4552.53,5003.88 4560.47,5011.82 4560.47,5245.94 4552.52,5253.89 U2.24@4532.26,5253.89 ; 4907.25,5153.51 4966.8,5093.96 5052.83,5093.96 5060.14,5101.27 5060.14,5285.48 5046.45,5299.17 4996.38,5299.17 4988.68,5306.87 4988.68,5453.43 4988.75,5453.5 R8.1 ; C17.2@4999.83,5658.5 4999.83,5521.65 5023.51,5497.97 ; R8.1 5023.51,5475.74 5023.51,5497.97 ; 5023.51,5497.97 5041.8,5497.97 C18.2 5280.86,5737.03 TFT.P$15 5280.86,5989.87 5521.68,5749.05 5588.73,5749.05 ; 5588.73,5749.05 5588.73,5775.17 5625.98,5812.42 5648.34,5812.42 5834.8,5998.88 5834.8,6033.19 5857.79,6056.18 5901.15,6056.18 5930.11,6027.22 5930.11,5898.26 POWER1.4 5902.24,5766.45 5920.75,5747.94
IC_4: C17.1 C19.1 D1.1 R22.2 U1.4 U9.3 | length 2373.5
  Top Layer w10: C17.1 5097.71,5658.5 5179.57,5740.36 D1.1@5771.73,5740.36 ; D1.1 D1.1@5771.73,5740.36 ; v1(6021.35,5631.54) 5912.53,5740.36 D1.1@5771.73,5740.36
  Bottom Layer w10: C19.1 4907.71,5923.5 4941.4,5957.19 5038.11,5957.19 5059.48,5935.82 5059.48,5696.73 5061.13,5695.08 C17.1 ; U9.3 5707.96,5567.95 5723.75,5583.74 5723.75,5608.5 R22.2 5758.51,5729.63 D1.1 ; U1.4 6071.6,5167.86 6071.6,5506.16 6021.35,5556.41 v1(6021.35,5631.54)
IN_FX: C6.1 R8.2 U6.4 | length 3648.6
  Top Layer w10: U6.4 2450.72,4349.51 2450.72,4432.75 2767.91,4749.94 3014.57,4749.94 3476.77,5212.14 4422.19,5212.14 4680.49,5470.44 v1(5094.44,5470.44)
  Bottom Layer w10: v1(5094.44,5470.44) 5105.19,5459.69 5105.19,5453.5 5139.95,5453.5 5157.33,5453.5 5174.71,5453.5 5219.78,5498.57 5294.35,5498.57 5335.51,5457.41 5335.51,5416.54 5358.54,5393.51 5379.43,5393.51 C6.1
INPUT: J1.6 J1.7 U6.3 | length 2606.9
  Top Layer w10: J1.7 3185.39,5655.11 3686.89,5655.11 J1.6
  Bottom Layer w10: U6.3 2551.5,4348.73 2551.5,4703.23 2376.8,4877.93 2376.8,5241.48 2386.09,5250.77 2729.61,5250.77 3065.8,5586.96 J1.7
J1_4: J1.4
J1_5: J1.5
J2_4: J2.4
J2_5: J2.5
LED: R17.2 U8.9 | length 873.8
  Top Layer w10: v2(3666.73,5183.5) 3666.73,5058.5 3696.73,5028.5 3871.73,5028.5 3936.73,4963.5 3936.73,4883.5 v2(3831.73,4778.5)
  Bottom Layer w10: U8.9 3656.49,5193.74 v2(3666.73,5183.5) ; v2(3831.73,4778.5) 3861.73,4748.5 R17.2
LED1_1: R12.2 S1.1 | length 427.4
  Bottom Layer w10: R12.2 3051.2,4901.72 3184.6,5035.12 3184.6,5122.99 3147.52,5160.07 3136.73,5160.07 S1.1
LED2_1: R13.2 S0.1 | length 341
  Bottom Layer w10: R13.2 2886.73,5090.86 2955.94,5160.07 2966.73,5160.07 S0.1
LED4_1: R18.1 S2.1 | length 380.3
  Bottom Layer w10: R18.1 3126.73,4936.48 3225.5,5035.25 3225.5,5094.63 3290.94,5160.07 3301.73,5160.07 S2.1
LED5_1: EP3.1 R19.1 | length 2167.2
  Bottom Layer w10: EP3.1 2426.73,5160.07 2429.93,5156.87 2831,5156.87 2922.21,5248.08 3047.06,5248.08 3855.7,6056.72 R19.1
LED6_1: EP2.1 R20.1 | length 2083.9
  Top Layer w10: v1(2693.47,5213.17) v1(3058.14,5213.17)
  Bottom Layer w10: EP2.1 2683.54,5203.24 v1(2693.47,5213.17) ; v1(3058.14,5213.17) 3058.14,5234.5 3845.54,6021.9 4301.67,6021.9 4301.73,6021.96 R20.1
MISO: U8.16
MIX_1: MIX.1 R25.1 R27.2 | length 2324.5
  Top Layer w10: MIX.1 2543.77,4348.62 2625.12,4348.62 2649.19,4372.69 2649.19,4403.45 2726.91,4481.17 3175.6,4481.17 3440.06,4745.63 v1(3774.16,4745.63)
  Bottom Layer w10: v1(3774.16,4745.63) 3774.16,4604.19 3824.12,4554.23 4115.44,4554.23 4121.73,4560.52 ; R27.2 4121.73,4564.49 4121.73,4560.52 ; R25.1 4391.73,4560.52 4390.34,4559.13 4123.12,4559.13 4121.73,4560.52
MIX_3: MIX.3 R26.1 R28.2 | length 1713.6
  Top Layer w10: MIX.3 3107.24,4390.1 3283.81,4566.67 3916.19,4566.67 v1(3926.82,4577.3)
  Bottom Layer w10: v1(3926.82,4577.3) 3942.26,4592.74 3942.26,4595.28 R28.2 3986.73,4612.66 3986.73,4630.04 3986.8,4630.11 4256.66,4630.11 4256.73,4630.04 R26.1
OUT_FX: C11.2 R7.1 U6.7 | length 881.5
  Top Layer w10: U6.7 2591.25,4098.02 2771.25,4098.02 C11.2
  Bottom Layer w10: R7.1 2831.73,4481.96 2905.14,4408.55 2905.14,4368.36 2970,4303.5 C11.2
OUTPUT: J2.6 J2.7 U6.8 | length 2399.8
  Top Layer w10: J2.7 2370.57,5655.25 2871.79,5655.25 J2.6
  Bottom Layer w10: J2.7 2302.28,4297.95 U6.8
R2_1: C11.1 R2.1 | length 356.8
  Bottom Layer w10: R2.1 2950.06,4365.52 2976.13,4365.52 3017.36,4324.29 3017.36,4144.13 C11.1
R17_1: LED3.1 R17.1 | length 882.8
  Bottom Layer w10: R17.1 3861.73,4625.04 3885.47,4648.78 4411.64,4648.78 4527.52,4532.9 LED3.1
R21_1: EP1.1 R21.1 | length 2079
  Bottom Layer w10: EP1.1 2781.73,5246.42 2930.54,5395.23 3171.52,5395.23 3875.08,6098.79 4419.42,6098.79 4426.73,6091.48 R21.1
R29_1: C2.1 R1.2 R29.1 U1.9 | length 3164.8
  Top Layer w10: v1(3097.16,4354.49) 3102.13,4349.52 v1(3252.98,4349.52) 3869.42,4349.52 4406.05,4886.15 5414.81,4886.15 5416.29,4884.67 5677.39,4884.67 U1.9
  Bottom Layer w10: R1.2 3068.4,4365.52 3086.13,4365.52 v1(3097.16,4354.49) ; C2.1 3216.73,4335.52 3186.73,4365.52 R29.1 3231.2,4400.28 3231.2,4371.3 v1(3252.98,4349.52)
RELAY: U6.1 U8.11 | length 1831.1
  Top Layer w10: v1(2989.85,4842.8) 3325.19,5178.14 v1(3398.5,5178.14) ; v1(3572.66,5469.31) v1(3690.24,5469.31)
  Bottom Layer w10: U6.1 2787.19,4313.04 2787.19,4551.51 2935.12,4699.44 2935.12,4788.07 v1(2989.85,4842.8) ; v1(3398.5,5178.14) 3455.44,5235.08 3455.44,5352.09 v1(3572.66,5469.31) ; v1(3690.24,5469.31) 3719.49,5440.06 U8.11
RST: C13.1 R14.1 U7.1 U8.29 | length 1631.9
  Top Layer w10: v1(3406.96,4273.03) 3582.35,4273.03 3649.15,4206.23 3738.83,4206.23 U7.1 ; v1(3911.73,4773.5) 3911.73,4789.48 v1(4042.23,4919.98)
  Bottom Layer w10: C13.1 3381.74,4271.2 3383.57,4273.03 v1(3406.96,4273.03) ; U7.1 3744.68,4814.31 3750.98,4820.61 ; U8.29 3750.98,4820.61 ; v1(3911.73,4773.5) 3864.62,4820.61 3750.98,4820.61 ; R14.1 4031.2,4931.72 4031.2,4931.01 v1(4042.23,4919.98)
S0: 1.2 R13.1 U2.16 U8.30 | length 4437.7
  Top Layer w10: v1(2784.7,4773) 2760.4,4773 2432.29,4444.89 2432.29,4343.77 2446.73,4329.33 2446.73,4289.12 2477.18,4258.67 2846.91,4258.67 2937.23,4348.99 3050.35,4348.99 3073.42,4325.92 3602.11,4325.92 v1@3686.19,4241.84 ; 1.2 3587.95,3979.49 3799.66,4191.2 3799.66,4267.46 ; v1(3686.2,4231.44) v1@3686.19,4241.84 ; v1(4442.42,4860.2) 4417.77,4860.2 3873.51,4315.94 3802.57,4315.94 3799.66,4313.03 3799.66,4267.46 ; v1@3686.19,4241.84 3711.81,4267.46 3799.66,4267.46
  Bottom Layer w10: v1(2784.7,4773) 2796.98,4785.28 R13.1 ; v1(3686.2,4231.44) 3719.49,4264.73 U8.30 ; v1(4442.42,4860.2) 4465.18,4860.2 4471.49,4853.89 U2.16
S1: 1.3 R12.1 U2.17 U8.31 | length 2819.1
  Bottom Layer w10: R12.1 3006.73,4750.52 3178.76,4578.49 3530.7,4578.49 ; 1.3 3566.33,3951.88 3566.33,4542.86 3530.7,4578.49 ; U8.31 U8.31@3687.99,4986.48 ; U2.17 4439.06,4903.89 4340.69,5002.26 3887.5,5002.26 3882.12,5007.64 3709.15,5007.64 U8.31@3687.99,4986.48 ; 3530.7,4578.49 3544.2,4591.99 3544.2,4611.11 3531.92,4623.39 3531.92,4891.75 3646.48,5006.31 3668.16,5006.31 U8.31@3687.99,4986.48
S2: R18.2 U2.18 U8.10 | length 1973.4
  Top Layer w10: v1(3697.92,5158.74) 3697.99,5158.67 v1(4246.49,5158.67)
  Bottom Layer w10: R18.2 3126.73,4820.04 3161.81,4820.04 3507.79,5166.02 3519.37,5166.02 3532.87,5179.52 3532.87,5198.64 3522.59,5208.92 3522.59,5227.56 3567.2,5272.17 3567.2,5308.1 3610.92,5351.82 3666.53,5351.82 3687.99,5330.36 U8.10 3697.92,5296.07 v1(3697.92,5158.74) ; v1(4246.49,5158.67) 4246.49,5141.86 4434.47,4953.88 U2.18
S$29: 
S$31: 
SCK: E1.6 E2.6 E3.6 U2.14 | length 1544.3
  Top Layer w10: E3.6 4901.73,4298.5 5226.73,4298.5 E2.6 5321.73,4303.5 5646.73,4303.5 E1.6
  Bottom Layer w10: E3.6 4907.25,4304.02 4907.25,4803.5 U2.14
SDA: E1.5 E2.5 E3.5 U2.15 | length 1745.2
  Top Layer w10: E3.5 4901.73,4198.5 5226.73,4198.5 E2.5 5321.73,4203.5 5646.73,4203.5 E1.5
  Bottom Layer w10: U2.15 4552.52,4803.5 4552.52,4786.5 4672.01,4667.01 4672.01,4328.22 E3.5
TFT_CS: TFT.P$14 U8.14 | length 1988
  Top Layer w10: v1(3805.33,5433.4) 3796.13,5442.7 3796.13,5483.9 4155.63,5843.5 5214.33,5843.5 TFT.P$14@5380.83,6010.1
  Bottom Layer w10: v1(3805.33,5433.4) 3805.33,5314.64 U8.14
TFT_DC: TFT.P$12 U8.13 | length 2278.1
  Top Layer w10: v1(3821.1,5468.92) 4126.66,5774.48 v1(5528.86,5774.48)
  Bottom Layer w10: U8.13 3782.27,5306.21 3782.27,5442.95 3808.24,5468.92 v1(3821.1,5468.92) ; v1(5528.86,5774.48) 5580.86,5826.48 TFT.P$12
TFT_P$3: TFT.P$3
TFT_P$4: TFT.P$4
TFT_P$5: TFT.P$5
TFT_P$6: TFT.P$6
TFT_P$16: TFT.P$16
TFT_RST: TFT.P$13 U8.12 | length 2408.3
  Bottom Layer w10: U8.12@3750.93,5306 3750.93,5469.6 3817.93,5536.6 3817.93,5848 3939.13,5969.1 4043.03,5969.1 4123.63,5888.5 4450.83,5888.5 4622.73,6060.5 5430.43,6060.5 TFT.P$13@5480.83,6010.1
TFT_SCK: TFT.P$10 U8.17 | length 2167.7
  Top Layer w10: v1(4521.06,5816) 5586.79,5816 TFT.P$10
  Bottom Layer w10: U8.17 3962.72,5243.74 4521.06,5802.08 v1(4521.06,5816)
TFT_SDA: TFT.P$11 U8.15 | length 2503.9
  Top Layer w10: v1(3907.22,5899.47) 3907.22,5943.55 4016.34,6052.67 4381.83,6052.67 4386.95,6057.79 5633.14,6057.79 TFT.P$11
  Bottom Layer w10: U8.15 3845.47,5837.72 v1(3907.22,5899.47)
U1_1: C21.2 R29.2 U1.1 VOLUME.1 VOLUME.2 | length 3702.4
  Top Layer w10: VOLUME.2 VOLUME.1 3399.31,4481.61 3884.46,4481.61 4768.1,5365.25 6009.51,5365.25 6017.24,5372.98 U1.1
  Bottom Layer w10: C21.2 3096.73,4306.42 3125.39,4335.08 3125.39,4420.62 3186.73,4481.96 ; R29.2 3186.73,4481.96 ; VOLUME.1 3215.94,4481.96 3186.73,4481.96
U1_2: C21.1 R27.1 R28.1 U1.2 VOLUME.3 | length 3721.8
  Top Layer w10: VOLUME.3 3831.7,4390.1 v1(4215.1,4773.5) 4380.03,4938.43 5478.33,4938.43 5610.35,5070.45 5774.19,5070.45 U1.2
  Bottom Layer w10: C21.1 3096.73,4181.03 3125.67,4209.97 3376.52,4209.97 3504.65,4338.1 VOLUME.3 ; R28.1 R27.1 4166.2,4711.72 4166.2,4724.6 v1(4215.1,4773.5)
U1_5: R3.1 R24.1 U1.5 | length 1472.9
  Top Layer w10: v1(5227.21,5401) v1(5417.37,5401) ; v1(5533.87,4907.73) 5589.05,4962.91 5966.65,4962.91 U1.5
  Bottom Layer w10: R3.1@5139.95,5243.5 5139.95,5348.5 5174.71,5348.5 v1(5227.21,5401) ; v1(5417.37,5401) 5458.68,5359.69 5458.68,5072.52 5533.87,4997.33 v1(5533.87,4907.73)
U1_6: C1.1 C4.1 U1.6 U1.7 | length 1062
  Top Layer w10: C4.1 5205.96,4847.73 5365.11,4847.73 5444.92,4767.92 5576.15,4767.92 C1.1 5665.48,4857.25 5973.49,4857.25 U1.7
  Bottom Layer w10: U1.7 U1.6
U1_8: C2.2 R1.1 R2.2 U1.8 | length 3685.1
  Top Layer w10: v1(3493.09,4448.12) 3802.53,4448.12 v1(3809.3,4441.35) ; v1(4423.09,4553.33) 4458.43,4588.67 v1(5589.54,4588.67)
  Bottom Layer w10: R2.2 3023.87,4516.72 ; C2.2 3216.73,4120.69 3216.73,4100.58 3215.66,4099.51 3057.54,4099.51 3043.87,4113.18 3043.87,4322.55 3023.87,4342.55 3023.87,4516.72 ; v1(3493.09,4448.12) 3389.66,4551.55 3068.47,4551.55 3068.4,4551.48 R1.1 3023.87,4516.72 ; v1(3809.3,4441.35) 3894.23,4526.28 4396.04,4526.28 v1(4423.09,4553.33) ; v1(5589.54,4588.67) 5706.22,4705.35 U1.8
U1_12: C8.2 R4.1 R6.2 U1.12 | length 861.7
  Bottom Layer w10: C8.2 R6.2 R6.2@5510.89,5453.5 ; R4.1 5528.27,5243.5 5528.34,5243.57 5528.34,5453.43 5528.27,5453.5 R6.2@5510.89,5453.5 ; U1.12 5644.78,5274.94 5644.78,5497.34 5636.68,5505.44 5562.83,5505.44 R6.2@5510.89,5453.5
U1_13: C3.1 U1.13 U1.14 | length 627.3
  Top Layer w10: C3.1 5311.73,5011.06 5614.17,5313.5 U1.13
  Bottom Layer w10: U1.13 U1.14
U2_1: C7.2 R5.1 U2.1 U2.2 | length 1638.3
  Top Layer w10: v1(4954.17,5278.24) 5000.01,5324.08 5498.12,5324.08 5516.58,5305.62 5516.58,5282.81 5341.81,5108.04 v1(5206.02,5108.04)
  Bottom Layer w10: U2.2@4866.72,5403.5 4903.28,5403.5 4907.24,5403.5 ; U2.1@4866.72,5453.5 4907.24,5453.5 4907.24,5403.5 ; R5.1 5006.13,5138.5 4988.75,5138.5 4954.17,5173.08 v1(4954.17,5278.24) 4948.88,5283.53 4948.88,5361.86 4907.24,5403.5 ; v1(5206.02,5108.04) 5206.02,5195.49 5213.81,5203.28 5213.81,5243.5 C7.2
U2_3: C9.1 U2.3 | length 724.4
  Bottom Layer w10: C9.1 4646.13,5886.92 4598.74,5839.53 4598.74,5580.97 4826.21,5353.5 U2.3@4866.73,5353.5
U2_9: C12.1 U2.9 X1.2 | length 1205.7
  Top Layer w10: X1.2 4742.92,4680.15 v1(4808.36,4745.59)
  Bottom Layer w10: v1(4808.36,4745.59) 4808.36,4952.06 4830.69,4974.39 4914.88,4974.39 ; U2.9@4866.72,5053.49 4907.24,5053.49 4914.88,5045.85 4914.88,4974.39 ; C12.1 5254.03,5032.28 5180.89,4959.14 4930.13,4959.14 4914.88,4974.39
U2_10: U2.10 X1.1 | length 656.2
  Top Layer w10: X1.1@4551.73,4636.85 v1(4782.74,4636.85)
  Bottom Layer w10: v1(4782.74,4636.85) 4782.74,4960.02 4826.21,5003.49 U2.10
U2_13: R11.2 U2.13 | length 903.4
  Top Layer w10: v1(4935.95,4860.6) 4943.96,4868.61 5399.73,4868.61 v1(5405.25,4863.09) ; v1(5406.67,5073.39) v1(5491.02,5073.39)
  Bottom Layer w10: U2.13 4928.85,4853.5 v1(4935.95,4860.6) ; v1(5405.25,4863.09) 5406.67,4864.51 v1(5406.67,5073.39) ; v1(5491.02,5073.39) 5491.02,5086.54 5493.51,5089.03 R11.2
U2_20: CTRL3.2 U2.20 | length 353
  Bottom Layer w10: CTRL3.2 4311.73,5213.64 4432.33,5093.04 4432.33,5085.15 4463.6,5053.88 4471.49,5053.88 U2.20@4512.01,5053.88
U2_21: CTRL2.2 U2.21 | length 1343.7
  Top Layer w10: CTRL2.2 3482.41,5371.8 v1(4260.1,5371.8) ; v1(4395.43,5091.36) 4452.05,5091.36 v1(4455.39,5094.7)
  Bottom Layer w10: v1(4260.1,5371.8) 4260.1,5226.69 v1(4395.43,5091.36) ; v1(4455.39,5094.7) 4464.59,5103.9 U2.21
U2_22: CTRL1.2 U2.22 | length 1970
  Top Layer w10: CTRL1.2 2660.09,5236.23 v1(4335.57,5236.23)
  Bottom Layer w10: v1(4335.57,5236.23) 4417.9,5153.9 U2.22
U2_26: C10.1 R9.1 U2.26 | length 1300.4
  Top Layer w10: C10.1 5303.97,5295.74 v1(5493.51,5295.74)
  Bottom Layer w10: U2.26@4512.01,5353.89 4553.58,5353.89 4833.08,5074.39 4940.84,5074.39 C10.1 ; v1(5493.51,5295.74) R9.1
U2_28: C5.1 U2.28 | length 1278.9
  Top Layer w10: v1(4790.61,5342.19) 4790.61,5165.34 4997.04,4958.91 5412.14,4958.91 C5.1
  Bottom Layer w10: U2.28@4512.01,5453.89 4678.91,5453.89 v1(4790.61,5342.19)
U6_2: U6.2 U6.9 | length 300
  Bottom Layer w10: U6.9 U6.2
U6_5: U6.5
U6_6: U6.6
U7_2: U7.2
U7_3: U7.3
U8_7: C14.2 U8.7 X2.1 | length 891.3
  Top Layer w10: v1(3603.08,5311.37) v1(3905.14,5311.37)
  Bottom Layer w10: U8.7 3621.5,5212.24 3639.07,5229.81 3639.07,5265.76 3603.08,5301.75 v1(3603.08,5311.37) ; v1(3905.14,5311.37) 3905.14,5357.17 3896.73,5365.58 C14.2 3896.73,5425.92 3896.73,5446.03 3957.23,5506.53 X2.1
U8_8: C15.2 U8.8 X2.2 | length 1100.9
  Top Layer w10: v1(3596.2,5271.05) 3901.63,5271.05 v1(3951.59,5321.01)
  Bottom Layer w10: U8.8 3594.73,5269.58 v1(3596.2,5271.05) ; v1(3951.59,5321.01) 3996.16,5365.58 4011.73,5365.58 C15.2 4011.73,5425.92 4011.73,5446.03 4056.8,5491.1 4056.8,5822.93 X2.2
U8_20: C16.1 U8.20 | length 1542.4
  Bottom Layer w10: U8.20@3938.73,5149.25 4003.65,5149.25 4279.19,5424.79 4675.4,5424.79 4781.06,5319.13 4800.17,5319.13 4812.6,5331.56 4901.97,5331.56 4907.31,5336.9 4907.31,5369 4897.83,5378.48 4833.4,5378.48 4764.43,5447.45 C16.1
UP_BTN: U8.32 UP.1 | length 1329.3
  Bottom Layer w10: U8.32 3666.19,4951.3 3666.19,4582.53 3656.49,4572.83 3656.49,4224.28 3719.43,4161.34 3767.25,4161.34 3799.66,4193.75 3799.66,4312.65 3896.8,4409.79 UP.1
pads on no net: CTRL1.4 CTRL1.5 CTRL2.4 CTRL2.5 CTRL3.4 CTRL3.5 MIX.4 MIX.5 U2.5 U2.27 VOLUME.4 VOLUME.5

## Polygon pours and split planes (outlines as drawn)
GND on Top Layer (solid): 2251.73,3803.5 2251.73,6243.5 6186.73,6243.5 6186.73,3803.5 2251.73,3803.5
GND on Bottom Layer (solid): 2256.73,3803.5 2251.73,3808.5 2251.73,6243.5 6186.73,6243.5 6186.73,3803.5 2256.73,3803.5

## Silkscreen, mask and mechanical layers (free items; w line width, h text height)
Top Overlay:
  text "MADE BY" at 2411.73,6043.5 h78.74
  text "NHATKHONGBUON" at 2406.73,5903.5 h118.11
  text "ANGEL 404" at 3676.73,4818.5 h196.85
Bottom Overlay:
  text "ANGEL 404" at 4716.73,6108.5 h157.48
  text "MADE BY" at 5836.73,4648.5 h80
  text "NHATKHONGBUON" at 5836.73,4548.5 h118.11
  text "UP" at 4216.73,4343.97 h59.05
  text "1 DTR RX TX 5V G G" at 5321.73,3833.5 h78.74
  text "DWN" at 2826.73,3813.97 h59.05
  text "BPS" at 6026.73,3813.97 h59.05
Document:
  lines w10: 1947.32,6055.63 ccw(c1939.41,6282.26) 2166.04,6274.35 ; 1956.95,3069.62 cw(c1949.03,2842.99) 2175.67,2850.9 ; 6175.67,6272.16 ccw(c6402.3,6280.08) 6394.39,6053.44 ; 6177.42,2852.65 cw(c6404.05,2844.74) 6396.14,3071.37 ; 1819.37,2713.11 1819.37,6413.9 6524.09,6413.9 6524.09,2713.11 1819.37,2713.11 ; 1947.32,2850.9 1947.32,6276.1 6396.14,6276.1 6396.14,2850.9 1947.32,2850.9

## Text inside footprints (layer, text, board x,y; h text height)
C9: Bottom Overlay "+" at 4696.67,5951.67 h31.5 r45
C17: Bottom Overlay "+" at 5111.67,5686.67 h31.5 r45
C18: Bottom Overlay "+" at 5331.67,5686.67 h31.5 r45
C19: Bottom Overlay "+" at 4921.67,5951.67 h31.5 r45
C20: Bottom Overlay "+" at 5146.67,5946.67 h31.5 r45
U6: Bottom Overlay "TQ2-5V" at 2786.73,4131.77 h59.05